# Altium PCB total_project.PcbDoc
Units mm, origin at the board's own origin, x right, y up, seen from the top; angles counter-clockwise.
Board outline 85.09 x 36.07 mm, 2 copper layers (Top Layer, Bottom Layer); 39 components, 60 nets, 190 pads, 17 vias.
Unrouted connection lines stored in the file: 1.
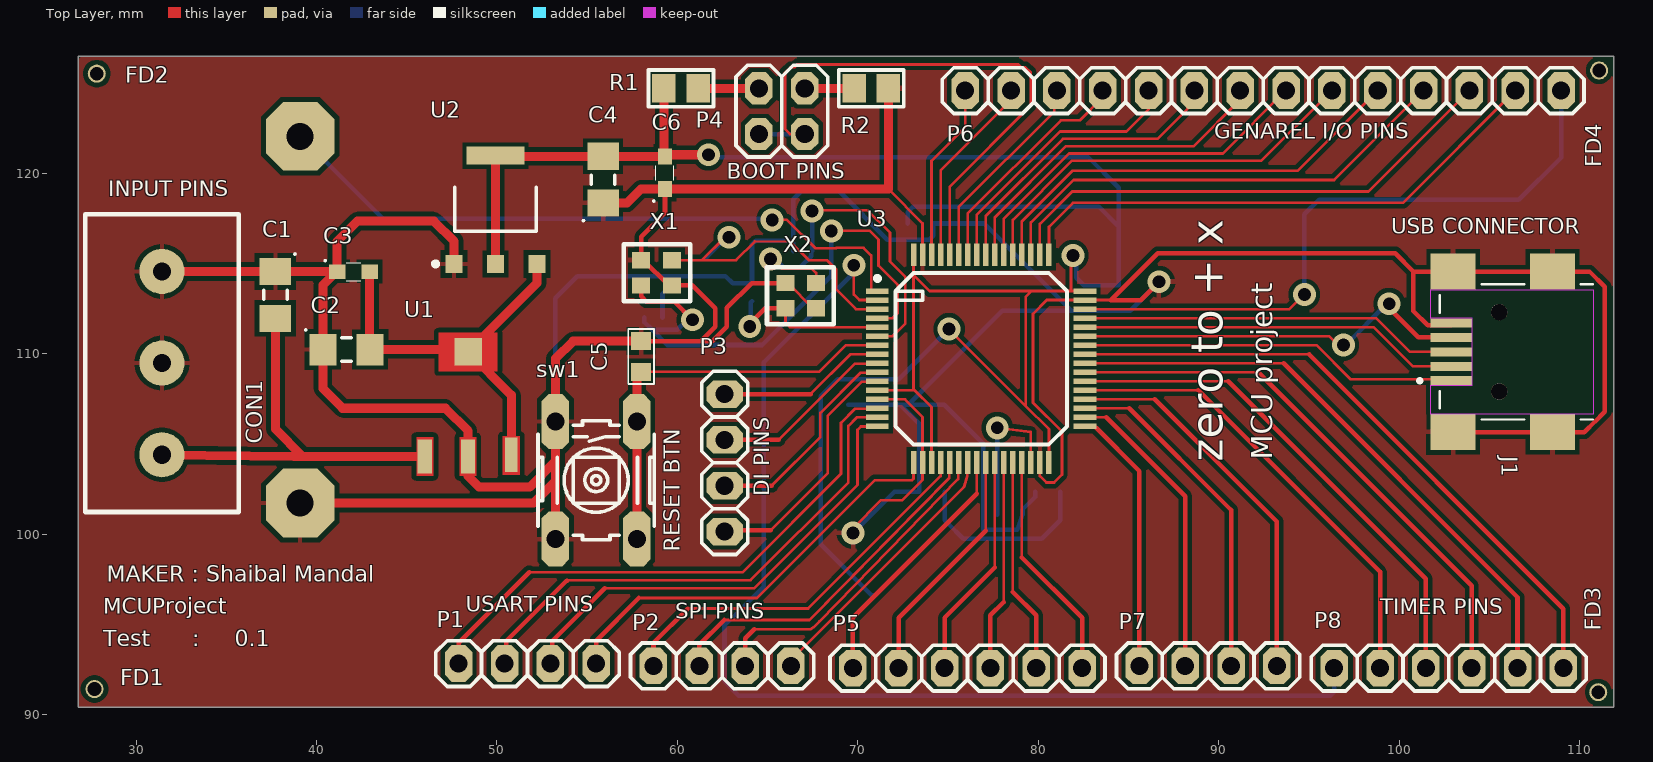
[diagram p0: Top Layer view]
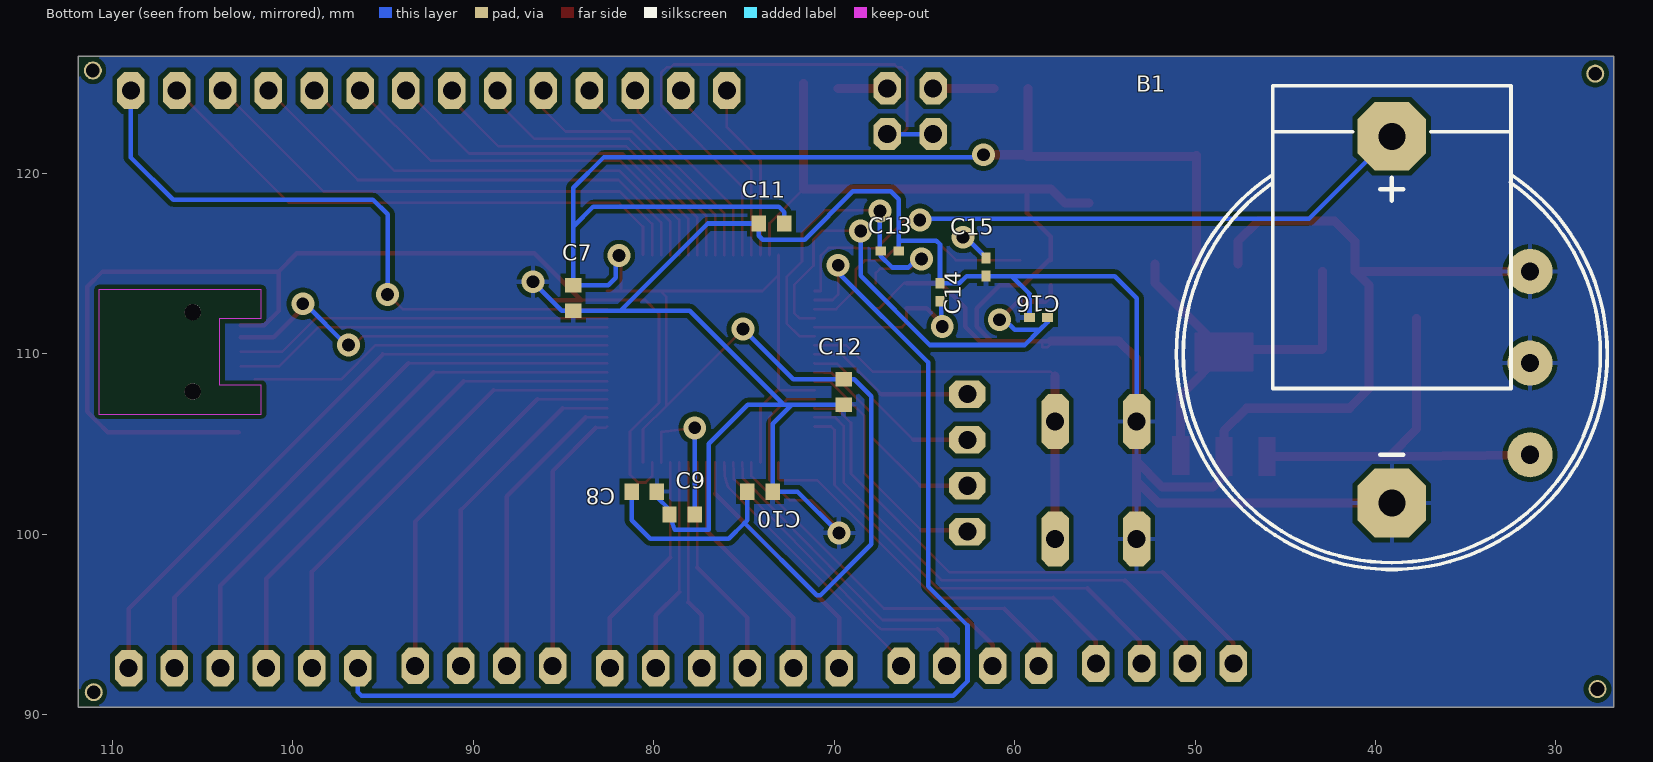
[diagram p1: Bottom Layer view, seen from below]
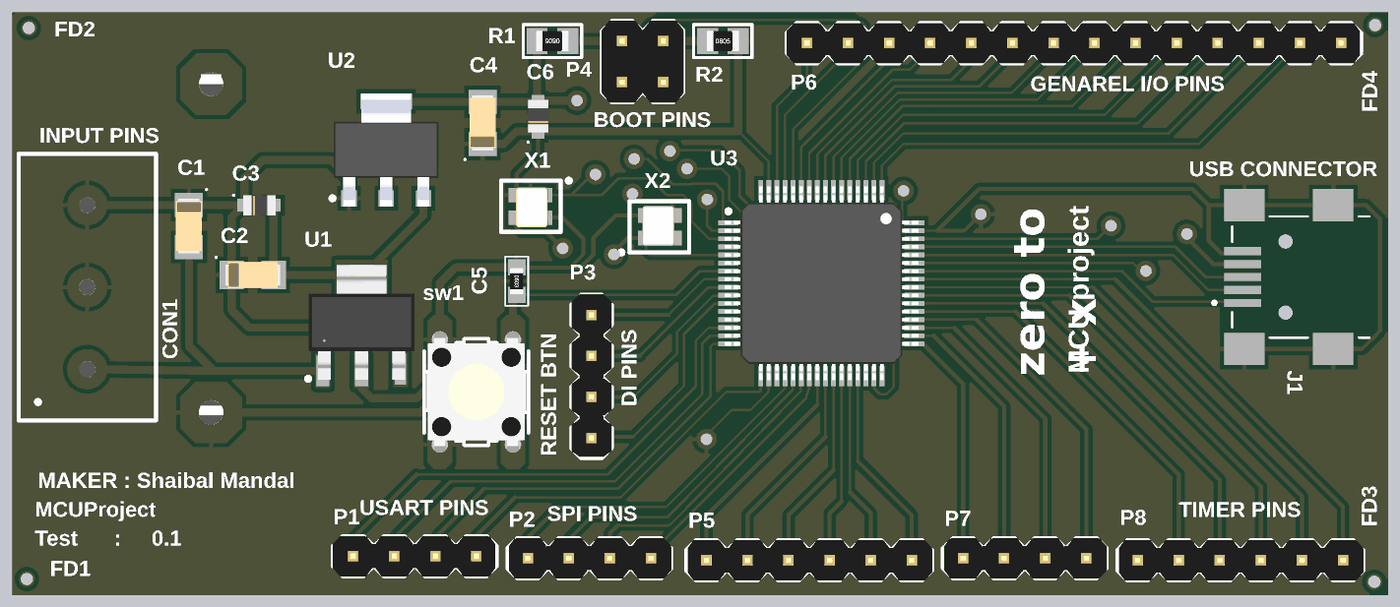
[diagram p2: 3D render of the assembled board from above, using the file's embedded part models]
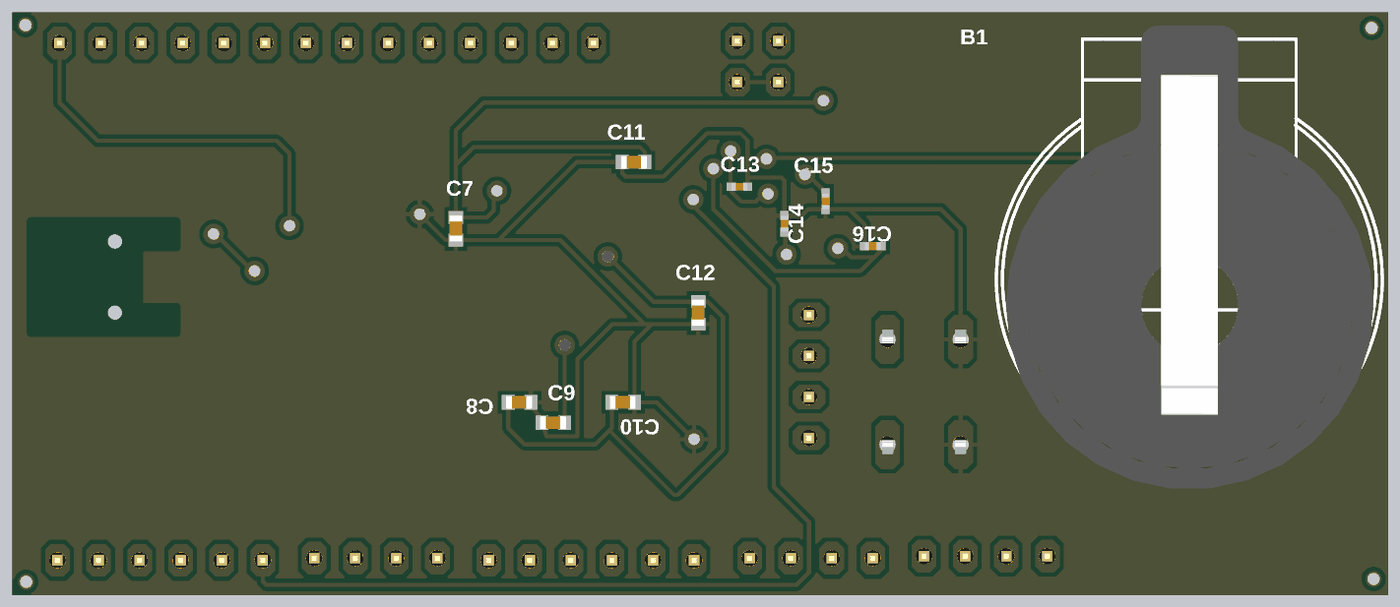
[diagram p3: 3D render of the assembled board from below, using the file's embedded part models]

## Layer stack, top to bottom
Top Solder: solder mask 0.0102, Solder Resist, Dk 3.5
Top Layer: signal copper 0.0356
Dielectric 1: dielectric 0.32, FR-4, Dk 4.8
Bottom Layer: signal copper 0.0356
Bottom Solder: solder mask 0.0102, Solder Resist, Dk 3.5

## Board outline
26.797,90.424 26.797,126.492 111.887,126.492 111.887,90.424

## Design rules (kind name [scope] priority, off if disabled: settings)
Clearance Clearance_1 [All] p1: gap=0.254 ignorepadtopadclearanceinfootprint=TRUE except(0: Arc-Hole Track-Hole SMDPad-Hole THPad-Hole Via-Hole Fill-Hole Poly-Hole Region-Hole Text-Hole)
Clearance [All] p2: gap=0.254 ignorepadtopadclearanceinfootprint=TRUE except(0: Arc-Hole Track-Hole SMDPad-Hole THPad-Hole Via-Hole Fill-Hole Poly-Hole Region-Hole Text-Hole)
PolygonConnect [All] p1: connectstyle=Relief reliefconductorwidth=0.254 reliefentries=4 polygonreliefangle="90 Angle" airgapwidth=0.254
RoutingVias [All] p1: holewidth=0.711 width=1.27 viastyle="Through Hole" minholewidth=0.711 minwidth=1.27 maxholewidth=0.711 maxwidth=1.27
SolderMaskExpansion [All] p1: expansion=0.102 istentingtop=TRUE
Width [All] p1: maxlimit=0.6 minlimit=0.15 preferedwidth=0.254 bottomlayer_minwidth=0.254 bottomlayer_maxwidth=0.254 minimp=50.000000 maximp=50.000000 favimp=50.000000
30 further rules are at their usual default settings.

## Components (designator, comment, footprint, x,y, rotation, side; value= is the part's Value field where it differs from the comment)
B1 "Littium Battery" MY_Battery 39.225,112.4 r180 bottom
C1 "0.22uF" CAPCP3216X16N 37.721,113.267 r270 top (schematic designator C12)
C2 "0.22uF" CAPCP3216X16N 41.667,110.236 r0 top (schematic designator C13)
C3 "Component_1" CAPCP2407X01N 42.048,114.554 r0 top (schematic designator C8)
C4 "0.22uF" CAPCP3216X16N 55.882,119.647 r90 top (schematic designator C14)
C5 "100nF" MY_0603 57.99,109.855 r270 top (schematic designator C11)
C6 "Component_1" CAPCP2407X01N 59.311,120.028 r90 top (schematic designator C7)
C7 "Cap Semi_1" 1608[0603]cap 84.455,113.092 r90 bottom value=100nF (schematic designator C2)
C8 "Cap Semi_1" 1608[0603]cap 80.518,102.362 r0 bottom value=100nF (schematic designator C3)
C9 "Cap Semi_1" 1608[0603]cap 78.421,101.092 r0 bottom value=4.7uF (schematic designator C6)
C10 "Cap Semi_1" 1608[0603]cap 74.106,102.362 r0 bottom value=100nF (schematic designator C4)
C11 "Cap Semi_1" 1608[0603]cap 73.471,117.221 r180 bottom value=100nF (schematic designator C1)
C12 "Cap Semi_1" 1608[0603]cap 69.469,107.885 r90 bottom value=100nF (schematic designator C5)
C13 "Cap Semi_4" 0402cap 66.921,115.697 r0 bottom value=10pF (schematic designator C15)
C14 "Cap Semi_4" 0402cap 64.135,113.411 r270 bottom value=10pF (schematic designator C16)
C15 "Cap Semi_4" 0402cap 61.595,114.808 r90 bottom value=10pF (schematic designator C10)
C16 "Cap Semi_4" 0402cap 58.674,112.014 r180 bottom value=10pF (schematic designator C9)
CON1 "connector" connector 31.436,109.487 r90 top
FD1 "FD" FD 27.7,91.425 r90 top (schematic designator FD3)
FD2 "FD" FD 27.825,125.525 r90 top (schematic designator FD4)
FD3 "FD" FD 111.025,91.25 r90 top (schematic designator FD1)
FD4 "FD" FD 111.075,125.7 r90 top (schematic designator FD2)
J1 "USB_MINI" EDAC_690-005-299-043 105.537,110.109 r90 top
P1 "Header 4" My_1X04 51.689,92.837 r0 top (schematic designator P6)
P2 "Header 4" My_1X04 62.484,92.71 r180 top (schematic designator P7)
P3 "Header 4" My_1X04 62.619,103.961 r270 top (schematic designator P5)
P4 "Header 2X2" My_2X02 65.786,123.444 r0 top (schematic designator P1)
P5 "Header 6" My_1X06 76.073,92.583 r180 top (schematic designator P2)
P6 "Header 14" My_1X14 92.456,124.587 r0 top (schematic designator P3)
P7 "Header 4" My_1X04 89.408,92.71 r180 top (schematic designator P8)
P8 "Header 6" My_1X06 102.743,92.583 r180 top (schematic designator P4)
R1 "10k" MY_0805 60.198,124.714 r180 top
R2 "550ohm" MY_0805 70.739,124.714 r0 top
sw1 "Tac switch" MY_TACTILE-PTH 55.499,102.997 r270 top
U1 "SOT223" PCBComponent_1 48.398,110.109 r0 top
U2 "AMS117" DPAK230P700X170-4N 49.922,117.983 r90 top
U3 "STM32F401RE" CQFP50P1200X1200X160-64N 76.835,109.728 r0 top
X1 "ECS-320-10-36B2-CKM-TR" ECS-320-10-36B2-CKM-TR 59.69,113.792 r180 top
X2 "ECS-320-10-36B2-CKM-TR" ECS-320-10-36B2-CKM-TR 65.991,113.919 r0 top

## Footprints (in the part's own frame and the unit in brackets; to place one, negate y for a bottom-side part, rotate by r counter-clockwise, add the part's x,y. Pads: shape width x height; smd on the part's side, far side on the other; paste and mask are expansions set on the pad)
0402cap [mm]
  rect 0.6x0.5 smd: 1(-0.5,0) 2(0.5,0)
  body extent -0.5,-0.25 0.5,0.25, height 0.51
1608[0603]cap [mm]
  rect 0.8x0.9 smd: 1(-0.7,0) 2(0.7,0)
  body extent -0.77,-0.4 0.83,0.4, height 0.9
CAPCP2407X01N [mm] "Chip Capacitor, 2-Leads, Body 2.35x0.70mm, IPC Medium Density"
  rect 0.9x0.8 smd: 1(-0.9,0) 2(0.9,0)
  silkscreen extent -1.61,-0.5 0.4,0.66, body extent -1.35,-0.63 1.35,0.61, height 1.55
CAPCP3216X16N [mm] "Chip Capacitor, 2-Leads, Body 3.25x1.65mm, IPC Medium Density"
  rect 1.5x1.75 smd: 1(-1.3,0) 2(1.3,0)
  silkscreen extent -2.31,-0.65 0.25,1.14, body extent -1.7,-0.85 1.7,0.85, height 1.85
connector [mm]
  round 2.5 hole 1: 1(-5.08,0) 2(0,0) 3(5.08,0)
  round 0.5 on Top Overlay: 17(-7.112,3.048)
  silkscreen extent -8.25,-4.25 8.25,4.25, body extent -8,-4.09 7.8,4.06, height 9.97
CQFP50P1200X1200X160-64N [mm] "CQFP, 64-Leads, Body 12.00x12.00mm, Pitch 0.50mm, IPC Medium Density"
  rect 1.25x0.3 smd: 1(-5.75,3.75) 2(-5.75,3.25) 3(-5.75,2.75) 4(-5.75,2.25) 5(-5.75,1.75) 6(-5.75,1.25) 7(-5.75,0.75) 8(-5.75,0.25) 9(-5.75,-0.25) 10(-5.75,-0.75) 11(-5.75,-1.25) 12(-5.75,-1.75) 13(-5.75,-2.25) 14(-5.75,-2.75) 15(-5.75,-3.25) 16(-5.75,-3.75) 33(5.75,-3.75) 34(5.75,-3.25) 35(5.75,-2.75) 36(5.75,-2.25) 37(5.75,-1.75) 38(5.75,-1.25) 39(5.75,-0.75) 40(5.75,-0.25) 41(5.75,0.25) 42(5.75,0.75) 43(5.75,1.25) 44(5.75,1.75) 45(5.75,2.25) 46(5.75,2.75) 47(5.75,3.25) 48(5.75,3.75)
  rect 0.3x1.25 smd: 17(-3.75,-5.75) 18(-3.25,-5.75) 19(-2.75,-5.75) 20(-2.25,-5.75) 21(-1.75,-5.75) 22(-1.25,-5.75) 23(-0.75,-5.75) 24(-0.25,-5.75) 25(0.25,-5.75) 26(0.75,-5.75) 27(1.25,-5.75) 28(1.75,-5.75) 29(2.25,-5.75) 30(2.75,-5.75) 31(3.25,-5.75) 32(3.75,-5.75) 49(3.75,5.75) 50(3.25,5.75) 51(2.75,5.75) 52(2.25,5.75) 53(1.75,5.75) 54(1.25,5.75) 55(0.75,5.75) 56(0.25,5.75) 57(-0.25,5.75) 58(-0.75,5.75) 59(-1.25,5.75) 60(-1.75,5.75) 61(-2.25,5.75) 62(-2.75,5.75) 63(-3.25,5.75) 64(-3.75,5.75)
  silkscreen extent -5.87,-4.75 4.75,4.75, body extent -6,-6 6,6, height 1.6
DPAK230P700X170-4N [mm] "TO, 4-Pads, Body 4.95x6.72mm (max), IPC Medium Density"
  rect 1x0.95 smd: 1(-3,2.3) 2(-3,0) 3(-3,-2.3)
  rect 1x3.2 smd: 2(3,0)
  silkscreen extent -3.12,-2.25 1.25,3.45, body extent -3.5,-3.4 3.5,3.3, height 1.8
ECS-320-10-36B2-CKM-TR [mm]
  rect 1x0.9 smd: 1(0,-1.4) 2(1.7,-1.4) 3(1.7,0) 4(0,0)
  round 0.5 on Top Overlay: 15(-1.524,-2.286)
  silkscreen extent -1.02,-2.29 2.67,0.89, body extent -0.24,-1.89 1.76,0.62, height 0.6
EDAC_690-005-299-043 [mm]
  rect 0.5x2.3 smd: 1(-1.6,2.65) 2(-0.8,2.65) 3(0,2.65) 4(0.8,2.65) 5(1.6,2.65)
  rect 2x2.5 smd: S1(-4.45,2.55) S2(4.45,2.55) S3(4.45,-2.95) S4(-4.45,-2.95)
  round 0.9 hole 0.9 unplated: ""(-2.2,0) ""(2.2,0)
  Keep-Out Layer region: 3.45,-5.2 -3.45,-5.2 -3.45,-4 -3.45,3.8 -1.85,3.8 -1.85,1.5 1.85,1.5 1.85,3.8 3.45,3.8
  Keep-Out Layer region: 3.45,-5.2 -3.45,-5.2 -3.45,3.8 -1.85,3.8 -1.85,1.5 1.85,1.5 1.85,3.8 3.45,3.8
  silkscreen extent -3.75,-5.2 3.75,4.5
FD [mm]
  round 1 hole 0.762: 29(0,0)
My_1X04 [mil]
  oct 60x80 hole 39.37: 1(-150,0) 2(-50,0) 3(50,0) 4(150,0)
  silkscreen extent -200,-50 200,50, body extent -200,-49 196,49, height 323
My_1X06 [mil]
  oct 60x80 hole 39.37: 1(-250,0) 2(-150,0) 3(-50,0) 4(50,0) 5(150,0) 6(250,0)
  silkscreen extent -300,-50 300,50, body extent -300,-49 296,49, height 323
My_1X14 [mil]
  oct 60x80 hole 39.37: 1(-650,0) 2(-550,0) 3(-450,0) 4(-350,0) 5(-250,0) 6(-150,0) 7(-50,0) 8(50,0) 9(150,0) 10(250,0) 11(350,0) 12(450,0) 13(550,0) 14(650,0)
  silkscreen extent -700,-50 700,50, body extent -700,-49 696,49, height 323
My_2X02 [mil]
  oct 60x70 hole 39.37: 1(-50,-50) 2(-50,50) 3(50,-50) 4(50,50)
  silkscreen extent -100,-100 100,100, body extent -100,-100 100,100, height 335
MY_0603 [mm]
  rect 1x1.1 smd: 1(-0.85,0) 2(0.85,0)
  silkscreen extent -1.52,-0.71 1.52,0.71, body extent -0.8,-0.4 0.8,0.4, height 0.44
MY_0805 [mm]
  rect 1.3x1.6 smd: 1(-0.95,0) 2(0.95,0)
  silkscreen extent -1.8,-1.02 1.8,1.02, body extent -1,-0.62 1,0.63, height 0.59
MY_Battery [mil]
  oct 150x150 hole 59.06: +(5,380) -(5,-420)
  silkscreen extent -465,-565 475,490, body extent -442,-608 454,522, height 278
MY_TACTILE-PTH [mil]
  oct 120x60 hole 39.37: 1(-128,89) 1(128,89) 2(-128,-89) 2(128,-89)
  silkscreen extent -130,-127 130,127, body extent -152,-118 152,118, height 197
PCBComponent_1 [mm]
  round 0.5 on Top Overlay: 0(-3.3,-6.3)
  rect 0.8x1.9 smd: 1(-2.4,-5.8) 2(0,-5.8)
  rect 1.524x1.524 smd: 3(0,0)
  rect 0.7x1.9 smd: 3(2.4,-5.7)
  Top Layer region: -1.625,-1.075 1.625,-1.075 1.625,1.075 -1.625,1.075
  Top Layer region: -0.475,-6.875 0.475,-6.875 0.475,-4.725 -0.475,-4.725
  Top Layer region: 1.919,-6.816 2.869,-6.816 2.869,-4.666 1.919,-4.666
  Top Layer region: -2.869,-6.875 -1.919,-6.875 -1.919,-4.725 -2.869,-4.725
  body extent -3.27,-6.35 3.27,0.75, height 1.65

## Part data
B1: library part Battery, "3V PC Littium Battery", ASiD Part Number=B-AS
C1 C2 C4: library part Capasitor
C5: library part "Cap ceramic", "None polar capacitor", ASiD Part Number=C-AS, Volte=50v
C7 C8 C10 C11 C12 C13 C14 C15 C16: "Capacitor (Semiconductor SIM Model)", LatestRevisionDate=29-May-2009, LatestRevisionNote="IPC-7351 Footprint Added.", PackageDescription="Chip Capacitor", PackageReference=C1206, Published=8-Jun-2000, Publisher="Altium Limited"
C9: library part "Cap Semi_1_1", "Capacitor (Semiconductor SIM Model)", LatestRevisionDate=29-May-2009, LatestRevisionNote="IPC-7351 Footprint Added.", PackageDescription="Chip Capacitor", PackageReference=C1206, Published=8-Jun-2000, Publisher="Altium Limited"
J1: library part 690-005-299-043, "USB - mini B USB 2.0 Receptacle Connector 5 Position Surface Mount, Right Angle", Package=None, Availability=Good, Check_prices=https://www.snapeda.com/parts/690-005-299-043/EDAC%20Inc./view-part/347309/?ref=eda, MF="EDAC Inc.", MP=690-005-299-043, Price=None, Purchase-URL=https://pricing.snapeda.com/search/part/690-005-299-043/?ref=eda, SnapEDA_Link=https://www.snapeda.com/parts/690-005-299-043/EDAC%20Inc./view-part/347309/?ref=snap
P1 P2 P3 P7: "Header, 4-Pin", ASiD Part Number="Header 4-AS"
P4: "Header, 2-Pin, Dual row", ASiD Part Number="Header 2X2-AS"
P5 P8: "Header, 6-Pin", ASiD Part Number="Header 6-AS"
P6: "Header, 14-Pin", ASiD Part Number="Header 14-AS"
R1 R2: library part Res, "Standard resistor", ASiD Part Number=Res-AS
sw1: "small tac switch", ASiD Part Number="Tac switch-AS"
U1: library part LM340
U2: library part AMS1117

## Via types
v1: diameter 1.27, hole 0.711, Top Layer to Bottom Layer, tented both sides, 17 vias

## Nets (pads, with @x,y where several pads share a name; then routed paths per layer and width w, separated by ;. In a path a pad name is that pad's centre, name@x,y a point inside that pad or via, vN(x,y) a via of type N, cw(c..) or ccw(c..) an arc to the next point about the centre after c; other vN are vias at no path point)
3V3: C4.2 C6.2 C7.2 C8.2 C10.2 C11.2 C12.2 R1.2 U2.2 U3.12 U3.19 U3.32 U3.48 U3.64 | length 146.4
  Top Layer w0.15: U2.2@49.922,120.983 U2.2@49.958,120.947 ; C6.2@59.248,120.991 C6.2 ; U3.12 73.085,107.978 ; U3.64 73.085,114.358 ; U3.19 74.085,106.024 74.085,107.045 73.152,107.978 73.085,107.978 ; v1(75.057,111.379) 75.057,111.354 79.299,107.112 ; U3.32 80.585,105.563 80.585,105.826 79.299,107.112 ; v1(81.915,115.443) 81.813,115.341 81.813,113.478 ; U3.48 81.813,113.478 ; 73.085,107.978 73.085,114.358 ; 73.085,114.358 73.965,113.478 79.623,113.478 ; 79.299,107.112 79.299,113.154 79.623,113.478 ; 79.623,113.478 81.813,113.478
  Top Layer w0.5: U2.2@49.922,114.983 U2.2@49.922,120.983 ; U2.2@49.958,120.947 C4.2 C6.2@59.292,120.947 ; C6.2@59.248,120.991 R1.2 ; C6.2 59.414,121.031 v1(61.722,121.031)
  Bottom Layer w0.254: v1(61.722,121.031) 61.849,120.904 82.753,120.904 84.455,119.202 84.455,117.043 ; C11.2 72.771,117.856 73.076,118.161 83.337,118.161 84.455,117.043 ; C10.2 74.806,100.787 74.967,100.627 ; v1(75.057,111.379) 72.263,108.585 C12.2 68.885,108.585 67.945,107.645 67.945,99.441 70.758,96.628 70.968,96.628 74.967,100.627 ; C8.2 81.218,100.787 80.184,99.753 75.84,99.753 74.967,100.627 ; v1(81.915,115.443) 82.109,115.249 82.109,114.207 82.525,113.792 C7.2 84.455,117.043
5VDC: C2.2 C3.2 U1.3 U2.3 | length 23
  Top Layer w0.15: C2.2@42.948,110.255 C2.2 ; U1.3@48.271,110.236 U1.3@48.398,110.109
  Top Layer w0.5: C2.2@42.948,110.255 C3.2 ; C2.2 U1.3@48.271,110.236 ; U1.3@50.798,104.409 50.798,107.709 48.398,110.109 52.222,113.933 U2.3
BOOT0: P4.1 P4.3 U3.60 | length 32.8
  Top Layer w0.15: P4.3 66.243,122.174 65.964,122.453 65.964,125.578 66.261,125.875 66.482,125.875 66.643,126.036 78.899,126.036 79.06,125.875 79.281,125.875 79.578,125.578 79.578,123.749 75.085,119.256 U3.60
  Bottom Layer w0.254: P4.1 P4.3
GND: B1.- C1.1 C2.1 C3.1 C4.1 C5.1 C6.1 C7.1 C8.1 C9.2 C10.1 C11.1 C12.1 C13.1 C14.1 C15.1 C16.1 CON1.2 CON1.3 J1.5 J1.S1 J1.S2 J1.S3 J1.S4 R2.2 sw1.2 U1.2 U2.1 U3.13 U3.18 U3.31 U3.47 U3.63 X1.2 X1.4 X2.2 X2.4 | length 298.2
  Top Layer w0.15: C1.1 C1.1@37.734,114.554 ; C3.1@41.098,114.554 C3.1 ; 48.398,103.226 U1.2 ; 53.238,102.946 53.238,102.997 ; C5.1 57.99,110.541 58.168,110.363 C5.1@58.465,110.363 ; X1.2 X1.2@58.115,115.192 ; C5.1@58.465,110.364 C5.1@58.465,110.705 ; X1.4@59.515,113.792 X1.4 ; X2.4 66.116,113.919 67.516,112.519 X2.2 ; v1(69.723,100.076) 69.723,100.33 71.287,101.894 72.466,101.894 73.585,103.014 U3.18 73.585,106.501 72.608,107.478 U3.13 ; 71.689,119.128 73.585,117.232 U3.63 ; U3.31 80.085,103.226 80.441,102.87 80.874,102.87 81.305,103.302 81.305,105.691 79.706,107.29 79.706,112.217 80.467,112.978 U3.47 84.022,112.978
  Top Layer w0.254: C5.1 58.465,110.705 61.301,110.705 ; X1.2 57.99,116.484 59.311,117.805 C6.1 ; X1.2@58.115,115.192 X1.4@59.515,113.792 ; X1.4 60.833,113.792 62.103,112.522 62.103,111.507 61.301,110.705 ; X2.4 64.11,113.919 62.738,112.547 62.738,111.506 61.937,110.705 61.301,110.705 ; v1(86.69,113.995) 85.673,112.978 84.022,112.978 86.614,115.57 99.773,115.57 100.784,114.559 ; J1.5@102.887,111.578 101.579,111.578 100.784,112.373 100.784,114.559 ; J1.S1 J1.S4 110.256,105.659 110.875,106.278 110.895,106.278 111.118,106.501 111.118,106.521 111.379,106.782 111.379,113.721 110.541,114.559 J1.S3 J1.S2 100.784,114.559
  Top Layer w0.5: CON1.3 C1.1 ; C1.1@37.734,114.554 41.098,114.554 40.367,113.823 C2.1 40.367,108.071 41.453,106.985 47.142,106.985 48.398,105.729 U1.2 ; B1.-@39.116,101.727 52.019,101.727 53.238,102.946 sw1.2@53.238,99.746 ; C3.1 41.148,116.23 42.266,117.348 46.504,117.348 47.622,116.23 U2.1 ; 48.398,103.226 49.008,102.616 51.816,102.616 53.238,104.038 ; 53.238,102.997 53.238,104.038 ; C4.1 57.201,118.347 57.982,119.128 C6.1 71.689,119.128 R2.2 R2.2@71.689,124.968 ; C5.1 54.215,110.705 53.238,109.728 53.238,106.248 53.238,104.038
  Bottom Layer w0.254: sw1.2@53.238,106.248 53.238,113.089 54.458,114.308 60.147,114.308 ; C16.1 59.174,113.335 60.147,114.308 ; C13.1 66.421,116.274 ; C12.1 72.339,107.185 ; v1(69.723,100.076) 69.744,100.076 72.03,102.362 C10.1 73.406,106.118 72.339,107.185 ; C8.1 79.818,102.068 79.121,101.371 C9.2 78.842,100.261 76.937,100.261 76.937,105.026 74.778,107.185 72.793,107.185 ; v1(86.69,113.995) 85.087,112.392 C7.1 81.837,112.392 ; 60.147,114.308 C15.1 62.662,114.308 63.059,113.911 C14.1 64.135,116.076 64.333,116.274 66.421,116.274 ; 66.421,116.274 66.421,118.564 66.856,118.999 68.961,118.999 71.628,116.332 73.965,116.332 74.171,116.538 C11.1 77.008,117.221 81.837,112.392 ; 72.339,107.185 72.793,107.185 ; 72.793,107.185 78,112.392 81.837,112.392
NetC1_2: C1.2 CON1.1 U1.1 | length 22.9
  Top Layer w0.5: CON1.1 38.757,104.309 39.252,104.309 ; C1.2 37.721,105.84 39.252,104.309 ; U1.1 39.252,104.309
NetP4_2: P4.2 R1.1 | length 3.4
  Top Layer w0.5: R1.1 P4.2
NetP4_4: P4.4 R2.1 | length 2.7
  Top Layer w0.5: P4.4 R2.1
NRST: C5.2 sw1.1 U3.7 | length 23.1
  Top Layer w0.15: C5.2@57.76,108.775 C5.2 67.857,109.005 69.33,110.478 U3.7
  Top Layer w0.5: sw1.1@57.76,99.746 57.76,106.248 C5.2@57.76,108.775
PA0/USART2_CTS: P1.1 U3.14 | length 31.4
  Top Layer w0.15: P1.1 P1.1@47.889,92.847 ; 51.792,97.893 63.603,97.893 69.065,103.355 69.065,106.177 69.845,106.957 71.064,106.957 U3.14
  Top Layer w0.254: P1.1@47.889,92.847 47.889,93.99 51.792,97.893
PA1/USART2_RTS: P1.2 U3.15 | length 28.8
  Top Layer w0.15: 53.9,97.437 53.924,97.461 64.06,97.461 69.469,102.87 69.469,106.01 69.937,106.478 U3.15
  Top Layer w0.254: P1.2 50.524,92.942 50.524,94.085 53.876,97.437 53.9,97.437
PA2/USART2_TX: P1.3 U3.16 | length 26
  Top Layer w0.15: P1.3 P1.3@52.969,92.847 ; 55.984,97.005 64.239,97.005 69.977,102.743 69.977,105.791 70.164,105.978 U3.16
  Top Layer w0.254: P1.3@52.969,92.847 53.064,92.942 53.064,94.085 55.984,97.005
PA3/USART2_RX: P1.4 U3.17 | length 23.5
  Top Layer w0.15: 57.861,96.469 64.414,96.469 70.942,102.997 72.997,102.997 73.085,103.085 U3.17
  Top Layer w0.254: P1.4 55.499,94.107 57.861,96.469
PA4/SPI1_NSS: P2.4 U3.20 | length 21.8
  Top Layer w0.15: 60.579,95.885 67.244,95.885 74.585,103.226 U3.20
  Top Layer w0.254: P2.4 58.674,93.98 60.579,95.885
PA5/SPI1_SCK: P2.3 U3.21 | length 19.7
  Top Layer w0.15: 62.586,95.25 67.312,95.25 67.399,95.337 75.061,103.132 75.061,103.214 75.064,103.217 75.064,103.428 75.064,103.431 U3.21
  Top Layer w0.254: P2.3 61.214,93.878 62.586,95.25
PA6/SPI1_MISO: P2.2 U3.22 | length 17.9
  Top Layer w0.15: 64.262,94.742 67.375,94.742 67.541,94.846 67.866,95.171 75.549,103.053 75.564,103.069 75.564,103.439 U3.22
  Top Layer w0.254: P2.2 63.754,94.234 64.262,94.742
PA7/SPI1_MOSI: P2.1 U3.23 | length 15.5
  Top Layer w0.15: P2.1 66.294,92.966 66.294,93.028 75.882,102.616 76.064,103.217 76.064,103.237 76.075,103.706 76.075,103.711 U3.23
  Bottom Layer w0.254: P2.1 P2.1@66.294,92.964
PA8/TIMER1_CH1: P8.1 U3.41 | length 35.6
  Top Layer w0.15: U3.41 95,109.978
  Top Layer w0.254: 95,109.978 109.093,95.885 P8.1
PA9/OTG._FS_VBUS: J1.1 U3.42 | length 20.3
  Top Layer w0.15: U3.42 95.423,110.478 97.313,108.588 101.601,108.588 J1.1@102.093,108.588
PA10/OTG_FS_ID: J1.4 U3.43 | length 22.4
  Top Layer w0.15: U3.43 96.11,110.978 96.598,110.49 v1(96.901,110.49)
  Top Layer w0.254: v1(99.441,112.776) 99.441,112.522 101.054,110.909 J1.4
  Bottom Layer w0.254: v1(96.901,110.49) 97.028,110.49 99.314,112.776 v1(99.441,112.776)
PA11/OTG_FS_DM: J1.2 U3.44 | length 21.2
  Top Layer w0.15: U3.44 98.58,111.478 100.749,109.309 J1.2
PA12/OTG_FS_DP: J1.3 U3.45 | length 21.1
  Top Layer w0.15: U3.45 98.715,111.978 100.584,110.109 J1.3
PA13: P6.14 U3.46 | length 36.2
  Top Layer w0.15: U3.46 93.911,112.478 94.716,113.284 v1(94.742,113.284)
  Bottom Layer w0.254: v1(94.742,113.284) 94.742,117.729 95.555,118.542 106.629,118.542 108.966,120.879 P6.14
PA14: P6.13 U3.49 | length 30.5
  Top Layer w0.15: U3.49 80.585,117.034 81.915,118.364 100.203,118.364 P6.13
PA15: P6.12 U3.50 | length 28.6
  Top Layer w0.15: U3.50 80.085,117.204 81.88,118.999 98.298,118.999 P6.12
PB0: P5.4 U3.26 | length 13.1
  Top Layer w0.15: P5.4 75.211,92.77 P5.4@75.274,92.833 ; 77.585,98.159 U3.26
  Top Layer w0.254: P5.4 74.803,95.377 77.585,98.159
PB1: P5.3 U3.27 | length 12.6
  Top Layer w0.15: P5.3@77.189,92.825 77.189,92.764 77.225,92.722 P5.3 ; U3.27@78.064,103.428 U3.27 78.085,96.246
  Top Layer w0.254: P5.3 77.343,95.504 78.085,96.246
PB2: P5.2 U3.28 | length 11.9
  Top Layer w0.15: 78.585,96.802 U3.28
  Top Layer w0.254: 78.585,96.802 79.883,95.504 P5.2
PB3: P6.7 U3.55 | length 18.9
  Top Layer w0.15: U3.55 77.585,117.561 81.533,121.509 88.616,121.509 91.186,124.079 P6.7
PB4: P6.6 U3.56 | length 17
  Top Layer w0.15: U3.56 77.085,117.632 81.365,121.913 86.607,121.913 88.256,123.562 88.256,123.606 88.646,123.996 P6.6
PB5: P6.5 U3.57 | length 15.2
  Top Layer w0.15: U3.57 76.585,117.704 81.198,122.317 84.877,122.317 86.106,123.546 P6.5
PB6: P6.4 U3.58 | length 12.8
  Top Layer w0.15: U3.58 76.085,117.775 81.246,122.936 82.296,122.936 83.566,124.206 P6.4
PB7: P6.3 U3.59 | length 11.4
  Top Layer w0.15: U3.59 75.585,118.13 80.889,123.434 80.889,124.45 P6.3
PB8: P6.2 U3.61 | length 10.7
  Top Layer w0.15: U3.61 74.585,120.157 78.486,124.058 P6.2
PB9: P6.1 U3.62 | length 9.9
  Top Layer w0.15: U3.62 74.085,120.694 75.946,122.555 P6.1
PB10: P5.1 U3.29 | length 12.8
  Top Layer w0.15: 79.085,98.715 U3.29
  Top Layer w0.254: 79.085,98.715 82.423,95.377 P5.1
PB12: P7.4 U3.33 | length 14.8
  Top Layer w0.15: U3.33 82.66,105.903 U3.33@83.2,105.903
  Top Layer w0.254: U3.33@83.2,105.903 85.598,103.505 P7.4
PB13: P7.3 U3.34 | length 16.8
  Top Layer w0.15: U3.34 83.768,106.478
  Top Layer w0.254: 83.768,106.478 88.138,102.108 P7.3
PB14: P7.2 U3.35 | length 19.1
  Top Layer w0.15: U3.35 85.046,106.978
  Top Layer w0.254: 85.046,106.978 90.678,101.346 P7.2
PB15: P7.1 U3.36 | length 21.4
  Top Layer w0.15: U3.36 86.451,107.478
  Top Layer w0.254: 86.451,107.478 93.218,100.711 P7.1
PC0/DO1: P3.1 U3.8 | length 9.4
  Top Layer w0.15: 67.385,107.771 69.592,109.978 U3.8
  Top Layer w0.254: P3.1 67.385,107.771
PC1/DO2: P3.2 U3.9 | length 10.2
  Top Layer w0.15: 65.607,105.231 69.833,109.457 71.064,109.457 U3.9
  Top Layer w0.254: P3.2 65.607,105.231
PC2/DO3: P3.3 U3.10 | length 11.9
  Top Layer w0.15: 65.226,102.691 67.922,105.387 67.922,106.72 70.159,108.957 70.535,108.957 70.556,108.978 U3.10
  Top Layer w0.254: P3.3 65.226,102.691
PC3/DO4: P3.4 U3.11 | length 13.8
  Top Layer w0.15: P3.4 P3.4@62.689,100.221 ; 65.169,100.221 68.326,103.378 68.326,106.553 70.23,108.457 71.064,108.457 U3.11
  Top Layer w0.254: P3.4@62.689,100.221 65.169,100.221
PC4: P5.6 U3.24 | length 15.2
  Top Layer w0.15: P5.6 70.044,93.445 P5.6@70.05,93.463 ; 76.585,102.239 U3.24
  Top Layer w0.254: P5.6 69.723,95.377 76.585,102.239
PC5: P5.5 U3.25 | length 14.4
  Top Layer w0.15: P5.5 P5.5@72.613,93.524 ; 77.085,100.199 U3.25
  Top Layer w0.254: P5.5 72.263,95.377 77.085,100.199
PC6/TIMER3_CH1: P8.5 U3.37 | length 25.8
  Top Layer w0.15: U3.37 88.872,107.978
  Top Layer w0.251: P8.5 98.933,97.917
  Top Layer w0.254: 88.872,107.978 98.933,97.917
PC7/TIMER3_CH2: P8.4 U3.38 | length 28.4
  Top Layer w0.15: U3.38 90.531,108.478
  Top Layer w0.254: 90.531,108.478 101.475,97.534 101.475,92.585 P8.4
PC8/TIMER3_CH3: P8.3 U3.39 | length 30.9
  Top Layer w0.15: U3.39 92.19,108.978
  Top Layer w0.254: 92.19,108.978 104.013,97.155 P8.3
PC9/TIMER3_CH4: P8.2 U3.40 | length 33.3
  Top Layer w0.15: U3.40 93.595,109.478
  Top Layer w0.254: 93.595,109.478 106.553,96.52 P8.2
PC10: P6.11 U3.51 | length 26.6
  Top Layer w0.15: U3.51 79.585,117.276 81.943,119.634 96.393,119.634 P6.11
PC11: P6.10 U3.52 | length 24.6
  Top Layer w0.15: U3.52 79.085,117.347 81.88,120.142 94.361,120.142 P6.10
PC12: P6.9 U3.53 | length 22.6
  Top Layer w0.15: U3.53 78.585,117.419 81.867,120.701 92.359,120.701 94.289,122.631 94.31,122.631 P6.9
PC13: P8.6 U3.2 | length 64.6
  Top Layer w0.15: v1(69.774,114.91) 69.774,113.283 70.079,112.978 U3.2
  Bottom Layer w0.254: v1(69.774,114.91) 69.774,114.503 64.795,109.525 64.795,97.13 62.611,94.945 62.611,91.846 63.398,91.059 96.19,91.059 96.393,91.262 P8.6
PC14-OSC_IN: C15.2 U3.3 X1.1 | length 17.8
  Top Layer w0.15: X1.1 61.369,115.192 ; v1(62.865,116.459) 62.636,116.459 61.369,115.192 ; U3.3 69.901,112.478 68.809,113.57 68.809,114.659 68.275,115.192 67.279,115.192 66.267,116.204 64.291,116.236 63.247,115.192 61.369,115.192
  Bottom Layer w0.254: C15.2 61.595,115.358 62.696,116.459 v1(62.865,116.459)
PC15-OSC_OUT: C16.2 U3.4 X1.3 | length 30.2
  Top Layer w0.15: v1(68.529,116.815) 70.663,116.815 71.142,116.336 71.142,114.888 72.216,113.814 72.216,112.261 71.933,111.978 U3.4
  Top Layer w0.254: X1.3 57.99,113.182 58.271,112.901 59.819,112.901 v1(60.833,111.887)
  Bottom Layer w0.254: C16.2 58.174,111.76 58.606,111.328 ; v1(60.833,111.887) 60.558,111.887 59.999,111.328 58.606,111.328 ; v1(68.529,116.815) 68.529,114.325 64.694,110.49 59.444,110.49 58.606,111.328
PD2: P6.8 U3.54 | length 20.6
  Top Layer w0.15: U3.54 78.085,117.49 81.7,121.105 90.223,121.105 93.705,124.587 P6.8
PH0-OSC_IN: C14.2 U3.5 X2.1 | length 9.9
  Top Layer w0.15: v1(64.008,111.506) v1@64.008,111.658 ; X2.1 65.991,111.73 66.243,111.478 U3.5
  Top Layer w0.254: v1@64.008,111.658 64.869,112.519 X2.1
  Bottom Layer w0.254: v1(64.008,111.506) 64.072,111.569 64.072,112.847 C14.2
PH1-OSC_OUT: C13.2 U3.6 X2.3 | length 21.3
  Top Layer w0.15: v1(65.151,115.258) 65.797,114.706 65.922,114.706 67.462,114.706 67.691,114.478 X2.3 ; v1(67.462,117.907) 67.462,117.5 67.912,117.95 70.543,117.95 71.78,116.713 71.78,115.113 72.62,114.273 72.62,111.665 71.933,110.978 U3.6
  Bottom Layer w0.254: v1(65.151,115.258) 65.426,115.258 65.901,114.783 66.786,114.783 67.421,115.418 C13.2 67.462,115.697 v1(67.462,117.907)
VBAT: B1.+ U3.1 | length 36.7
  Top Layer w0.15: v1(65.253,117.424) 66.065,117.424 67.64,115.849 68.786,115.849 68.81,115.874 70.307,115.874 70.738,115.443 70.738,113.478 U3.1
  Bottom Layer w0.254: B1.+@39.116,122.047 43.688,117.475 65.202,117.475 v1(65.253,117.424)
VCAP1: C9.1 U3.30 | length 8.4
  Top Layer w0.15: v1(77.721,105.901) 79.585,105.664 U3.30
  Bottom Layer w0.254: C9.1 v1(77.721,105.901)
pads on no net: CON1.17 FD1.29 FD2.29 FD3.29 FD4.29 J1. U1.0 X1.15 X2.15

## Polygon pours and split planes (outlines as drawn)
GND on Bottom Layer "GND_L02_P001" (solid, pour order 1): 26.797,126.492 111.887,126.492 111.887,90.678 111.633,90.424 26.797,90.424
GND on Top Layer "GND_L01_P004" (solid, pour order 4): 26.775,126.275 26.992,126.492 111.887,126.492 111.887,90.678 111.633,90.424 26.797,90.424 26.797,126.492

## Other copper
Top Layer:
  pour cut-out: 41.125,111.025 41.15,111 42.225,111 42.225,109.5 42.2,109.475 42.175,109.5 41.1,109.5 41.1,111 41.15,111.05
  pour cut-out: 41.648,115.054 42.448,115.054 42.448,114.054 41.648,114.054
  pour cut-out: 55.125,120.225 56.6,120.225 56.6,119.075 55.175,119.075 55.175,120.175
  pour cut-out: 58.811,120.428 59.811,120.428 59.811,119.628 58.811,119.628
  pour cut-out: 38.537,113.838 38.55,113.85 38.575,113.825
  pour cut-out: 36.875,113.825 36.9,113.85 38.55,113.85
  pour cut-out: 60.396,114.782 60.422,114.808 63.368,114.808 64.184,115.624 64.275,115.534 64.275,114.837 64.752,114.36 64.695,114.303 64.695,114.233 63.901,114.233 62.446,112.778 62.285,112.778 62.28,112.773 60.819,114.234 60.524,114.234 60.396,114.106

## Silkscreen, mask and mechanical layers (free items; w line width, h text height)
Top Overlay:
  text "GENAREL I/O PINS" at 89.75,121.618 h1.5
  text "BOOT PINS" at 62.738,119.398 h1.5
  text "INPUT PINS" at 28.475,118.418 h1.5
  text "USB CONNECTOR" at 99.568,116.35 h1.5
  text "MCU project" at 93.348,104.14 h2 r90
  text "zero to + x" at 90.805,104.013 h3 r90
  text "DI PINS" at 65.387,102.108 h1.5 r90
  text "RESET BTN" at 60.432,99.025 h1.52 r90
  text "MAKER : Shaibal Mandal" at 28.375,97.068 h1.52
  text "USART PINS" at 48.26,95.395 h1.5
  text "MCUProject" at 28.195,95.279 h1.5
  text "TIMER PINS" at 98.933,95.268 h1.5
  text "SPI PINS" at 59.875,95.018 h1.5
  text "Test      :     0.1" at 28.194,93.49 h1.52